# EAGLE board Nusbio SPI Extension (EAGLE 9.6.2)
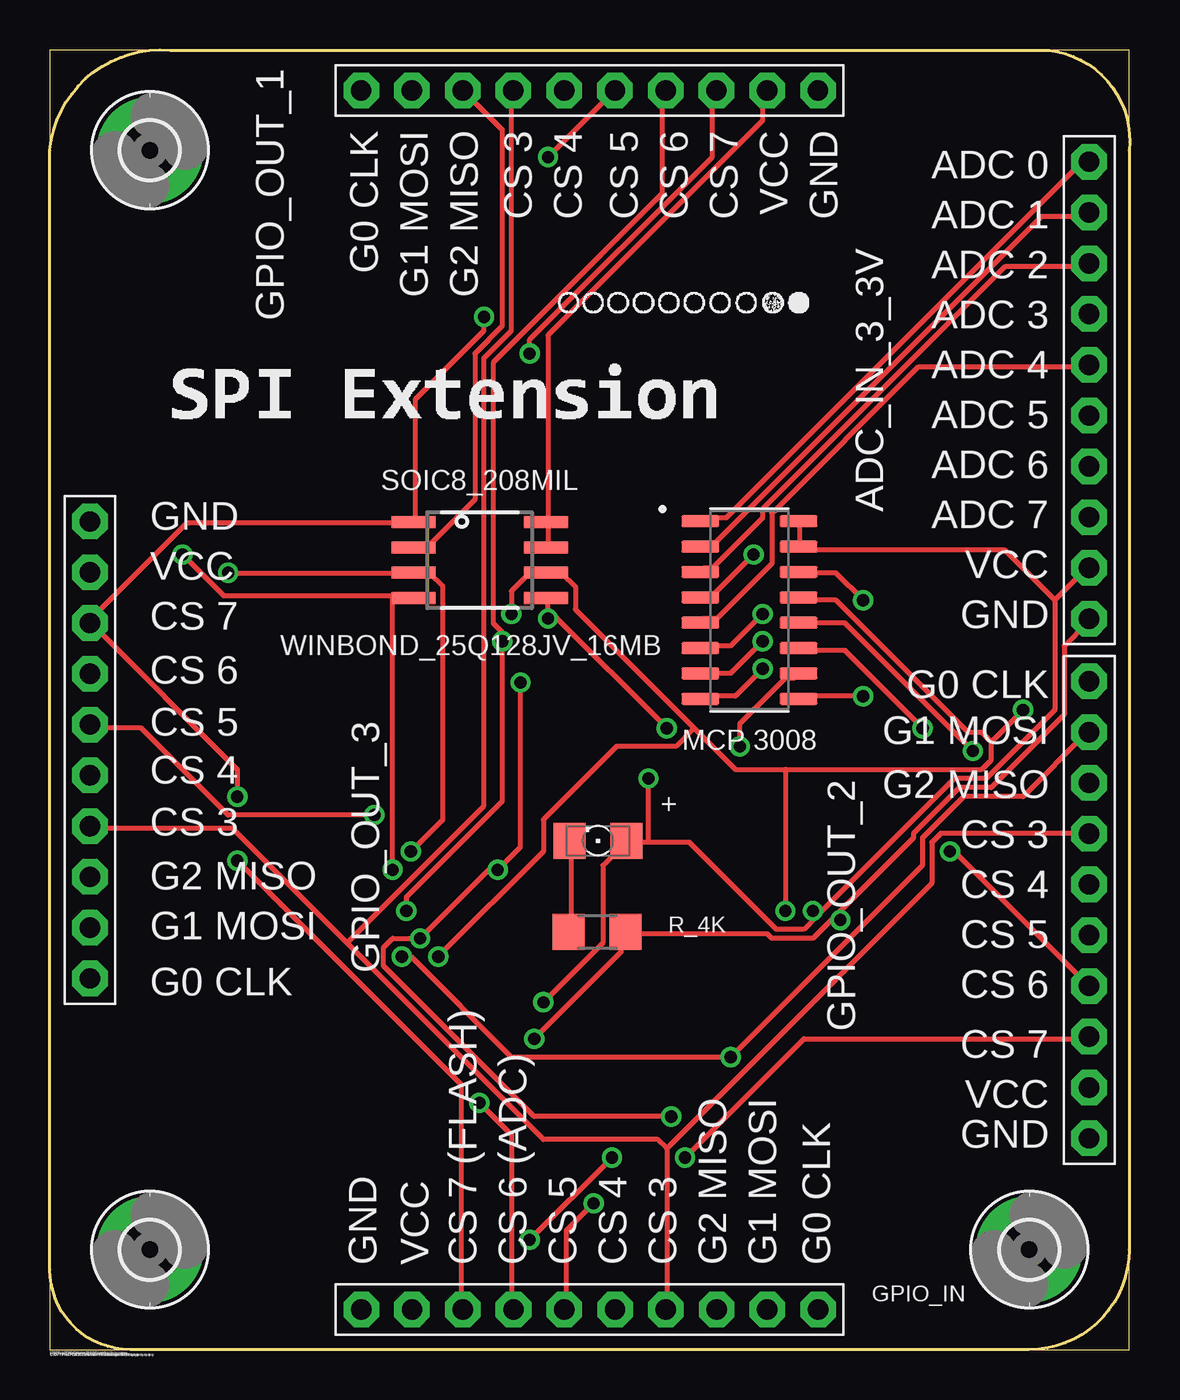
[diagram p0: board, top side]
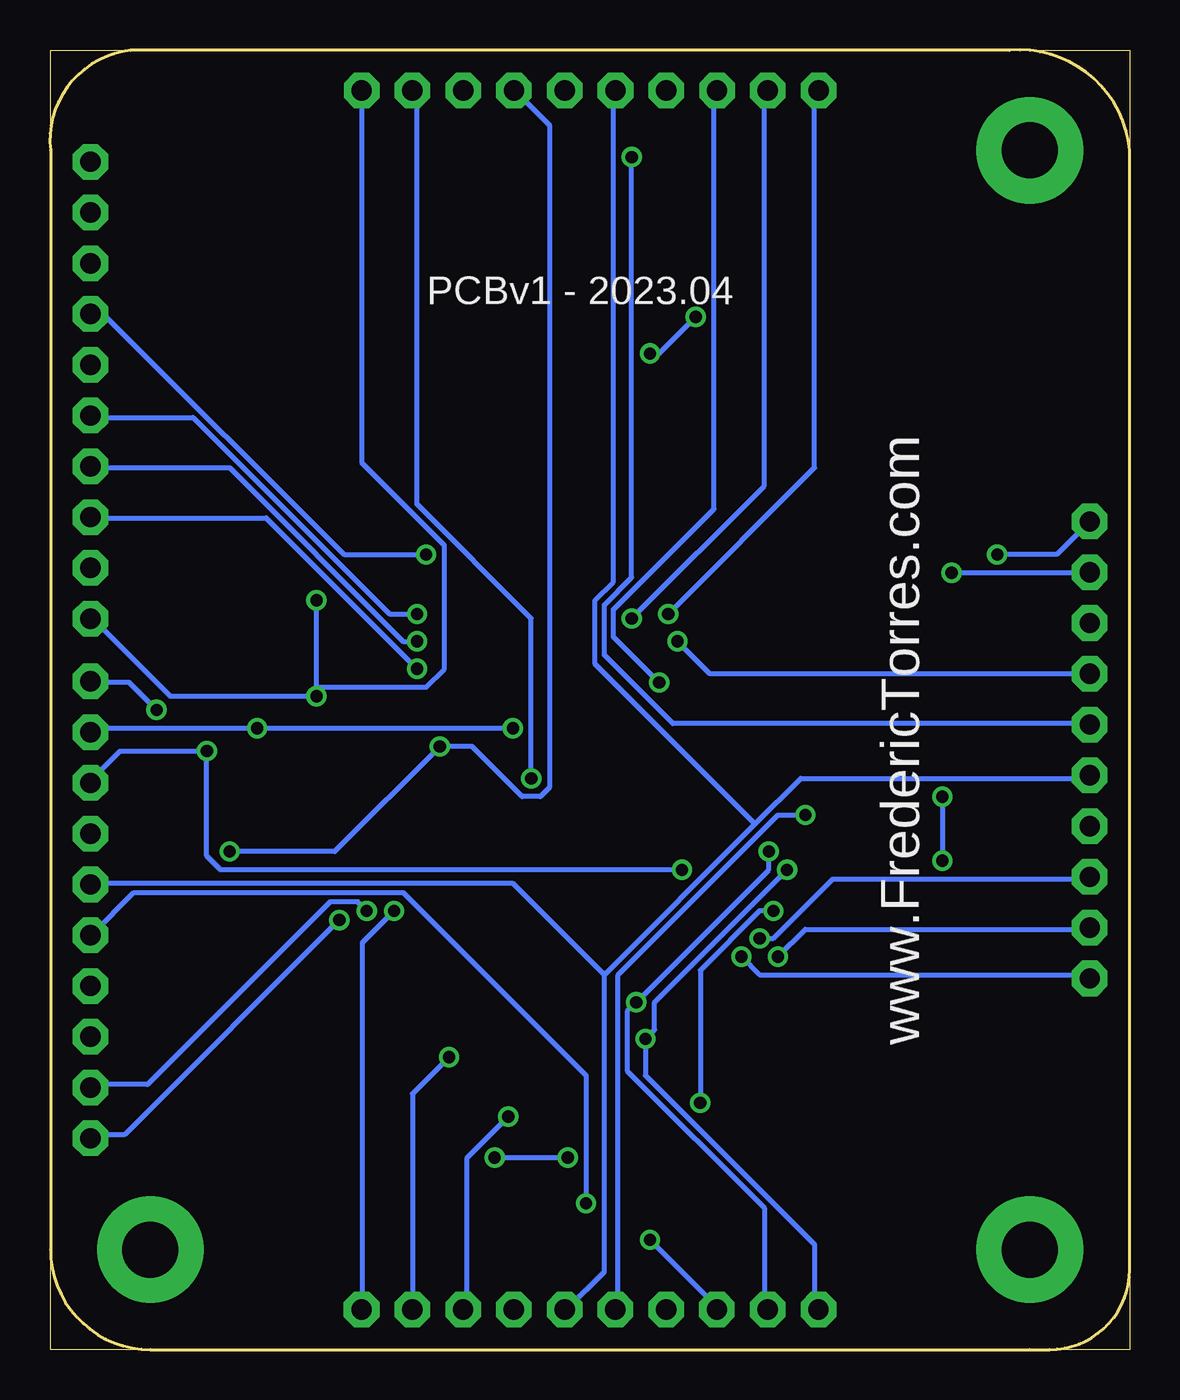
[diagram p1: board, bottom side, seen from below]

Size 54.03 x 65.02 mm. Coordinates in mm from the lower left corner, seen from the top.
Outline: 5,0 0,0 0,4
Outline: 49,0 54,0 54,5
Outline: 54,60 54,65 50,65
Outline: 6,65 0,65 0,60
Outline: 0,4 0,60
Outline: 0,60 arc-90 6,65
Outline: 6,65 50,65
Outline: 50,65 arc-90 54,60
Outline: 54,60 54,5
Outline: 54,5 arc-90 49,0
Outline: 49,0 5,0
Outline: 5,0 4,0 arc-90 0,4
Copper layers (1*16): Top 0.035mm / dielectric 1.5mm / Bottom 0.035mm
Design rules "default": minimum track width 10mil, minimum drill 24mil, track to track 8mil, track to pad 8mil, pad to pad 8mil, via to via 8mil, smd to smd 8mil, copper to edge 40mil, drill to drill 8mil, minimum pad ring 10mil, minimum via ring 8mil, stop-mask expansion 4mil, vias tented up to drill 0mil, thermal gap 10mil

## Footprints (pad centres in the part's own frame; a part is rotated, then mirrored left to right if it is on the bottom)
1X10-BIG = drill 1.016 pad 1.778 octagon: 1 -11.43,0; 2 -8.89,0; 3 -6.35,0; 4 -3.81,0; 5 -1.27,0; 6 1.27,0; 7 3.81,0; 8 6.35,0; 9 8.89,0; 10 11.43,0
2,8-PAD = drill 2.8 pad 5.334: B2,8 0,0
1206 = smd 1.6 x 1.803: A -1.422,0; C 1.422,0
SOIC127P600X175-16N = smd 1.9 x 0.6: 1 -2.455,4.445; 2 -2.455,3.175; 3 -2.455,1.905; 4 -2.455,0.635; 5 -2.455,-0.635; 6 -2.455,-1.905; 7 -2.455,-3.175; 8 -2.455,-4.445; 9 2.455,-4.445; 10 2.455,-3.175; 11 2.455,-1.905; 12 2.455,-0.635; 13 2.455,0.635; 14 2.455,1.905; 15 2.455,3.175; 16 2.455,4.445
R1206 = smd 1.6 x 1.803: 1 -1.422,0; 2 1.422,0
SOIC8_208MIL = smd 0.6 x 2.2: 1 -1.905,-3.315; 2 -0.635,-3.315; 3 0.635,-3.315; 4 1.905,-3.315; 5 1.905,3.315; 6 0.635,3.315; 7 -0.635,3.315; 8 -1.905,3.315

## Placement (x,y rotation side)
ADC_IN_3_3V  PINHD-1X10  [1X10-BIG]  52,48 270 top
GPIO_IN  PINHD-1X10  [1X10-BIG]  27,2 180 top
GPIO_OUT_1  PINHD-1X10  [1X10-BIG]  27,63 0 top
GPIO_OUT_2  PINHD-1X10  [1X10-BIG]  52,22 270 top
GPIO_OUT_3  PINHD-1X10  [1X10-BIG]  2,30 90 top
H1  MOUNT-PAD-ROUND2.8  [2,8-PAD]  5,5 0 top
H2  MOUNT-PAD-ROUND2.8  [2,8-PAD]  5,60 0 top
H3  MOUNT-PAD-ROUND2.8  [2,8-PAD]  49,5 0 top
LED_POWER  [1206]  27.42,25.46 180 top
MCP_3008_3_3V  MCP3008-I/SL  [SOIC127P600X175-16N]  35,37 0 top
R_4K  [R1206]  27.38,20.9 180 top
SOIC8_208MIL  [SOIC8_208MIL]  21.5,39.5 270 top

## Library data of the parts
ADC_IN_3_3V GPIO_IN GPIO_OUT_1-GPIO_OUT_3 LED_POWER R_4K = adafruit
H1-H3 = holes
MCP_3008_3_3V = MCP3008-I_SL; AVAILABILITY: In Stock; DESCRIPTION: 10 Bit Analog to Digital Converter 4, 8 Input 1 SAR 16-SOIC; MF: Microchip; MP: MCP3008-I/SL; PACKAGE: SOIC-16 Microchip; PRICE: None; PURCHASE-URL: https://pricing.snapeda.com/search/part/MCP3008-I/SL/?ref=eda
SOIC8_208MIL = microbuilder

## Nets
ADC0: ADC_IN_3_3V.1 MCP_3008_3_3V.1
ADC1: ADC_IN_3_3V.2 MCP_3008_3_3V.2
ADC2: ADC_IN_3_3V.3 MCP_3008_3_3V.3
ADC3: ADC_IN_3_3V.4 MCP_3008_3_3V.4
ADC4: ADC_IN_3_3V.5 MCP_3008_3_3V.5
ADC5: ADC_IN_3_3V.6 MCP_3008_3_3V.6
ADC6: ADC_IN_3_3V.7 MCP_3008_3_3V.7
ADC7: ADC_IN_3_3V.8 MCP_3008_3_3V.8
GND: ADC_IN_3_3V.10 GPIO_IN.10 GPIO_OUT_1.10 GPIO_OUT_2.10 GPIO_OUT_3.10 MCP_3008_3_3V.9 MCP_3008_3_3V.14 R_4K.1 SOIC8_208MIL.4
GPIO0: GPIO_IN.1 GPIO_OUT_1.1 GPIO_OUT_2.1 GPIO_OUT_3.1 MCP_3008_3_3V.13 SOIC8_208MIL.6
GPIO1: GPIO_IN.2 GPIO_OUT_1.2 GPIO_OUT_2.2 GPIO_OUT_3.2 MCP_3008_3_3V.11 SOIC8_208MIL.5
GPIO2: GPIO_IN.3 GPIO_OUT_1.3 GPIO_OUT_2.3 GPIO_OUT_3.3 MCP_3008_3_3V.12 SOIC8_208MIL.2
GPIO3: GPIO_IN.4 GPIO_OUT_1.4 GPIO_OUT_2.4 GPIO_OUT_3.4
GPIO4: GPIO_IN.5 GPIO_OUT_1.5 GPIO_OUT_2.5 GPIO_OUT_3.5
GPIO5: GPIO_IN.6 GPIO_OUT_1.6 GPIO_OUT_2.6 GPIO_OUT_3.6
GPIO6: GPIO_IN.7 GPIO_OUT_1.7 GPIO_OUT_2.7 GPIO_OUT_3.7 MCP_3008_3_3V.10
GPIO7: GPIO_IN.8 GPIO_OUT_1.8 GPIO_OUT_2.8 GPIO_OUT_3.8 SOIC8_208MIL.1
N$1: LED_POWER.C R_4K.2
VCC: ADC_IN_3_3V.9 GPIO_IN.9 GPIO_OUT_1.9 GPIO_OUT_2.9 GPIO_OUT_3.9 LED_POWER.A MCP_3008_3_3V.15 MCP_3008_3_3V.16 SOIC8_208MIL.3 SOIC8_208MIL.7 SOIC8_208MIL.8

## Tracks (layer width: path | path; a pad name or v marks a point on that pad's centre or on a via)
ADC0
  Top 0.254: MCP_3008_3_3V.1 32.69,41.6 33.83,41.6 51.44,59.21 51.89,59.21 ADC_IN_3_3V.1
ADC1
  Top 0.254: MCP_3008_3_3V.2 32.69,40.23 33.15,40.23 49.61,56.69 51.89,56.69 ADC_IN_3_3V.2
ADC2
  Top 0.254: MCP_3008_3_3V.3 32.69,39.09 33.15,39.09 35.66,41.6 35.66,42.06 47.78,54.18 51.89,54.18 ADC_IN_3_3V.3
ADC3  (via drill 0.61)
  Top 0.254: v35.2,39.78 33.15,37.72 32.69,37.72 MCP_3008_3_3V.4
  Bottom 0.254: v35.2,39.78 39.32,39.78 51.21,51.66 51.89,51.66 ADC_IN_3_3V.4
ADC4
  Top 0.254: MCP_3008_3_3V.5 32.69,36.58 33.38,36.58 36.12,39.32 36.12,41.83 43.43,49.15 51.89,49.15 ADC_IN_3_3V.5
ADC5  (via drill 0.61)
  Top 0.254: v35.66,36.8 34.06,35.2 32.69,35.2 MCP_3008_3_3V.6
  Bottom 0.254: v35.66,36.8 37.03,36.8 46.86,46.63 51.89,46.63 ADC_IN_3_3V.6
ADC6  (via drill 0.61)
  Top 0.254: v35.66,35.43 34.06,33.83 32.69,33.83 MCP_3008_3_3V.7
  Bottom 0.254: v35.66,35.43 36.35,35.43 45.03,44.12 51.89,44.12 ADC_IN_3_3V.7
ADC7  (via drill 0.61)
  Top 0.254: v35.66,34.06 34.29,32.69 32.69,32.69 MCP_3008_3_3V.8
  Bottom 0.254: v35.66,34.06 43.2,41.6 51.89,41.6 ADC_IN_3_3V.8
GND  (via drill 0.61)
  Top 0.254: 17.14,37.72 8.69,37.72 v6.63,39.78 | 17.14,37.72 18.06,37.72 SOIC8_208MIL.4 17.14,37.72 | 39.32,21.72 43.2,25.6 43.2,25.83 45.49,28.12 47.09,28.12 50.75,31.77 50.75,35.2 51.89,36.35 ADC_IN_3_3V.10 | 39.32,21.72 38.18,20.57 36.12,20.57 35.89,20.8 28.8,20.8 R_4K.1 28.57,20.8 28.57,19.89 v24.23,15.54 | v40.69,32.69 37.49,32.69 MCP_3008_3_3V.9 | v40.69,37.49 39.32,38.86 37.49,38.86 MCP_3008_3_3V.14 | 39.32,21.72 v39.55,21.49 | v17.14,24 17.14,37.72
  Bottom 0.254: v6.63,39.78 3.66,39.78 2.06,41.38 GPIO_OUT_3.10 | ADC_IN_3_3V.10 51.89,36.58 48.01,32.69 v40.69,32.69 40.69,33.15 | 40.69,33.15 v40.69,37.49 | GPIO_IN.10 15.77,2.06 15.77,5.26 24.23,13.72 v24.23,15.54 23.77,16 23.77,17.37 v17.14,24 | v39.55,21.49 50.29,10.74 51.89,10.74 GPIO_OUT_2.10 | 40.69,33.15 35.2,33.15 34.29,34.06 34.29,40.23 38.41,44.35 38.41,62.87 GPIO_OUT_1.10
GPIO0  (via drill 0.61)
  Top 0.254: 47.09,30.4 46.63,30.86 45.95,30.86 39.32,37.49 37.49,37.49 MCP_3008_3_3V.13 | 47.09,30.4 47.09,29.49 46.63,29.03 36.8,29.03 | 36.8,29.03 34.29,29.03 32.23,31.09 | 32.23,31.09 26.29,37.03 26.29,38.18 25.6,38.86 24.92,38.86 SOIC8_208MIL.6 24.69,38.86 24,38.86 23.09,37.95 v23.09,36.8 | v19.43,19.66 24.69,24.92 24.69,26.52 28.35,30.18 31.32,30.18 32.23,31.09 | 36.8,29.03 v36.8,21.95 | 47.09,30.4 v48.69,32
  Bottom 0.254: v19.43,19.66 18.52,18.75 2.06,18.75 GPIO_OUT_3.1 | v23.09,36.8 15.77,44.12 15.77,62.87 GPIO_OUT_1.1 | v36.8,21.95 38.41,20.34 38.41,2.06 GPIO_IN.1 | v48.69,32 50.06,33.38 51.89,33.38 GPIO_OUT_2.1
GPIO1  (via drill 0.61)
  Top 0.254: v43.66,31.09 39.78,34.98 37.49,34.98 MCP_3008_3_3V.11 | v30.86,31.09 25.15,36.8 | 25.15,36.8 24.92,37.03 24.92,37.49 SOIC8_208MIL.5 | v17.6,19.66 18.06,19.66 23.09,14.63 v34.06,14.63 43.66,24.23 43.66,25.6 45.72,27.66 48.69,27.66 51.89,30.86 GPIO_OUT_2.2 | 25.15,36.8 v24.92,36.58
  Bottom 0.254: GPIO_OUT_2.2 51.89,31.09 v43.66,31.09 v30.86,31.09 | v17.6,19.66 16.23,21.03 2.06,21.03 GPIO_OUT_3.2 | v34.06,14.63 35.89,12.8 35.89,2.06 GPIO_IN.2 | v24.92,36.58 18.29,43.2 18.29,62.87 GPIO_OUT_1.2
GPIO2  (via drill 0.61)
  Top 0.254: SOIC8_208MIL.2 18.29,40.23 18.97,40.23 21.26,42.52 21.26,49.84 22.63,51.21 22.63,61.04 20.8,62.87 GPIO_OUT_1.3 | v46.18,29.95 39.78,36.35 37.49,36.35 MCP_3008_3_3V.12 | v31.09,11.66 24.23,11.66 16.69,19.2 16.69,20.12 17.14,20.57 v18.52,20.57 21.95,24 v22.4,24 23.55,25.15 v23.55,33.38
  Bottom 0.254: GPIO_OUT_2.3 51.89,28.57 50.52,29.95 v46.18,29.95 46.18,24.69 45.49,24 v22.4,24 | v18.52,20.57 17.83,20.57 14.86,23.55 2.06,23.55 GPIO_OUT_3.3 | v31.09,11.66 33.15,9.6 33.15,2.06 GPIO_IN.3 | v23.55,33.38 25.83,35.66 25.83,37.03 20.8,42.06 20.8,62.87 GPIO_OUT_1.3
GPIO3
  Top 0.254: 30.86,10.06 30.86,2.06 GPIO_IN.4 | 30.86,10.06 44.12,23.32 44.12,25.38 44.58,25.83 51.89,25.83 GPIO_OUT_2.4 | 14.86,20.34 24.69,10.52 30.4,10.52 30.86,10.06 | 14.86,20.34 9.14,26.06 2.06,26.06 GPIO_OUT_3.4 | 14.86,20.34 21.72,27.2 21.72,49.61 23.09,50.98 23.09,62.87 GPIO_OUT_1.4
GPIO4
  Bottom 0.254: 26.29,18.75 18.75,26.29 | 18.75,26.29 16.46,28.57 2.06,28.57 GPIO_OUT_3.5 | 26.29,18.75 26.29,3.89 28.12,2.06 GPIO_IN.5 | 18.75,26.29 26.75,34.29 26.75,37.49 25.83,38.41 25.83,62.87 GPIO_OUT_1.5 | 26.29,18.75 30.86,23.32 51.89,23.32 GPIO_OUT_2.5
GPIO5  (via drill 0.61)
  Top 0.254: v27.2,7.32 25.83,5.94 25.83,2.06 GPIO_IN.6 | v16.23,26.75 8.91,26.75 4.57,31.09 2.06,31.09 GPIO_OUT_3.6 | v24.92,59.66 28.12,62.87 GPIO_OUT_1.6
  Bottom 0.254: v27.2,7.32 27.2,13.72 36.35,22.86 49.84,22.86 51.89,20.8 GPIO_OUT_2.6 | v16.23,26.75 17.6,26.75 25.6,18.75 25.6,2.06 GPIO_IN.6 | v24.92,59.66 24.92,38.63 26.29,37.26 26.29,34.75 22.86,31.32 2.06,31.32 GPIO_OUT_3.6
GPIO6  (via drill 0.61)
  Top 0.254: v34.52,30.18 34.52,31.32 36.8,33.6 37.26,33.6 MCP_3008_3_3V.10 | GPIO_OUT_1.7 30.63,62.87 30.63,57.84 22.17,49.38 22.17,36.35 22.63,35.89 v22.63,35.43 22.63,27.43 17.83,22.63 v17.83,21.95 | v21.49,12.34 23.09,10.74 23.09,2.06 GPIO_IN.7 | v45.03,24.92 45.26,24.92 51.89,18.29 GPIO_OUT_2.7
  Bottom 0.254: GPIO_OUT_1.7 30.63,62.87 29.03,61.27 29.03,28.12 29.49,27.66 30.4,27.66 32.92,30.18 v34.52,30.18 39.78,24.92 v45.03,24.92 | v22.63,35.43 21.03,33.83 2.06,33.83 GPIO_OUT_3.7 | v21.49,12.34 21.49,18.97 18.52,21.95 v17.83,21.95
GPIO7  (via drill 0.61)
  Top 0.254: v9.37,24.46 20.57,13.26 20.57,2.06 GPIO_IN.8 | v9.37,27.66 9.37,29.03 2.06,36.35 GPIO_OUT_3.8 2.06,36.58 6.86,41.38 18.06,41.38 SOIC8_208MIL.1 18.29,41.6 18.29,47.55 21.72,50.98 v21.72,51.66 | v24,49.84 24,50.52 33.15,59.66 33.15,62.87 GPIO_OUT_1.8 | v31.77,9.6 37.72,15.54 51.89,15.54 GPIO_OUT_2.8 | v24,5.49 v28.12,9.6
  Bottom 0.254: v9.37,27.66 v9.37,24.46 | v24,49.84 23.55,49.84 v21.72,51.66 | v28.12,9.6 v31.77,9.6 | v24,5.49 20.57,2.06 GPIO_IN.8
N$1
  Top 0.254: R_4K.2 26.06,21.03 26.06,25.38 LED_POWER.C
VCC  (via drill 0.61)
  Top 0.254: SOIC8_208MIL.7 24.92,40.23 24.92,41.38 SOIC8_208MIL.8 24.92,41.6 24.92,50.75 35.66,61.49 35.66,62.87 GPIO_OUT_1.9 | v8.91,38.86 18.06,38.86 SOIC8_208MIL.3 18.29,38.86 18.97,38.86 19.66,38.18 19.66,26.52 v18.06,24.92 | MCP_3008_3_3V.16 37.49,41.38 37.49,40.23 MCP_3008_3_3V.15 37.49,40.01 47.78,40.01 50.29,37.49 | 29.95,25.38 32,25.38 36.35,21.03 37.72,21.03 38.41,21.72 | 29.95,25.38 29.03,25.38 LED_POWER.A 28.8,25.38 27.66,24.23 27.66,20.34 v24.69,17.37 | 38.41,21.72 45.26,28.57 46.86,28.57 50.29,32 50.29,37.49 | 50.29,37.49 51.89,39.09 ADC_IN_3_3V.9 | 38.41,21.72 v38.18,21.95 | 29.95,25.38 v29.95,28.57
  Bottom 0.254: v8.91,38.86 2.06,38.86 GPIO_OUT_3.9 | GPIO_IN.9 18.29,2.06 18.29,7.09 25.15,13.95 25.15,16.92 v24.69,17.37 18.06,24 v18.06,24.92 | v38.18,21.95 38.63,22.4 40.01,22.4 49.15,13.26 51.89,13.26 GPIO_OUT_2.9 | v29.95,28.57 29.95,36.58 35.66,42.29 35.66,62.87 GPIO_OUT_1.9

## Text on the board
tNames: G0 CLK | G1 MOSI | G2 MISO | CS 3 | CS 4 | CS 5 | CS 6 | CS 7 | VCC | GND | ADC 0 | ADC 1 | ADC 2 | ADC 3 | ADC 4 | ADC 5 | ADC 6 | ADC 7 | GND | VCC | VCC | GND | CS 7 | WINBOND_25Q128JV_16MB | G0 CLK | CS 6 | G1 MOSI | CS 5 | MCP 3008 | G2 MISO | CS 4 | + | CS 3 | CS 3 | CS 4 | G2 MISO | CS 5 | G1 MOSI | CS 6 | G0 CLK | CS 7 | VCC | GND | GND | VCC | CS 7 (FLASH) | CS 6 (ADC) | CS 5 | CS 4 | CS 3 | G2 MISO | G1 MOSI | G0 CLK | C:/DVT/Fred.PCB/2023/MadeInTheUSB.Logo.Gray.50.Small.bmp | C:/DVT/Fred.PCB/2023/MadeInTheUSB.Logo.Gray.50.bmp | C:/DVT/Fred.PCB/2023/MadeInTheUSB.Logo.Gray.50.bmp | C:/DVT/Fred.PCB/2023/Nusbio Flash Extension/MadeInTheUSB.Logo.Gray.bmp | C:/DVT/Fred.PCB/2023/Nusbio Flash Extension/Title.Logo.Gray.bmp | C:/DVT/Fred.PCB/2023/Nusbio SPI Extension/Title.Logo.Gray.bmp | C:/DVT/Fred.PCB/2023/Nusbio SPI Extension/Title.Logo.Gray.bmp
bNames: PCBv1 - 2023.04 | www.FredericTorres.com